# EAGLE board dotclock (EAGLE 7.2.0)
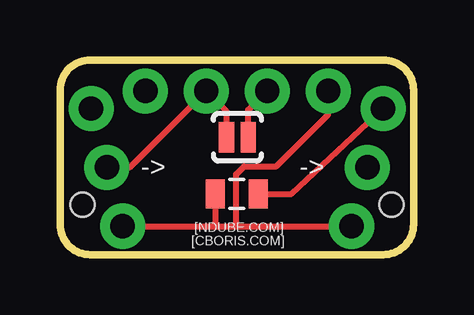
[diagram p0: board, top side]
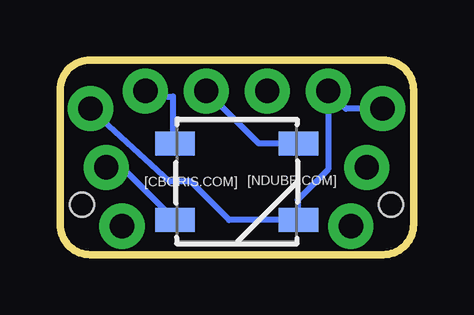
[diagram p1: board, bottom side, seen from below]

Size 14.73 x 8.13 mm. Coordinates in mm from the lower left corner, seen from the top.
Outline: 1.27,8.13 13.46,8.13 arc-90 14.73,6.86 14.73,1.27 arc-90 13.46,0 1.27,0 arc-90 0,1.27 0,6.86 arc-90 1.27,8.13
Copper layers (1*16): Top 0.035mm / dielectric 1.5mm / Bottom 0.035mm
Design rules "default": minimum track width 10mil, minimum drill 24mil, track to track 8mil, track to pad 8mil, pad to pad 8mil, via to via 8mil, smd to smd 8mil, copper to edge 40mil, drill to drill 8mil, minimum pad ring 10mil, minimum via ring 8mil, stop-mask expansion 4mil, vias tented up to drill 0mil, thermal gap 10mil
Holes 1 mm at 0.94,2.08 13.82,2.08

## Footprints (pad centres in the part's own frame; a part is rotated, then mirrored left to right if it is on the bottom)
0805 = smd 0.8 x 1.2: 1 -0.9,0; 2 0.9,0
WS2812B = smd 1.651 x 1: 1 -2.577,1.6; 2 -2.577,-1.6; 3 2.577,-1.6; 4 2.577,1.6
1X04_NO_SILK_ALL_ROUND = drill 1.016 pad 1.88: 1 0,0; 2 2.54,0; 3 5.08,0; 4 7.62,0
1X03_NO_SILK = drill 1.016 pad 1.88: 1 0,0; 2 2.54,0; 3 5.08,0
SJ_2S-NO = smd 0.635 x 1.27: 1 -0.45,0; 2 0.45,0

## Placement (x,y rotation side)
C2  [0805]  7.37,2.54 0 top
D1  [WS2812B]  7.37,3.05 0 bottom
JP1  [1X04_NO_SILK_ALL_ROUND]  3.56,6.83 0 top
JP3  [1X03_NO_SILK]  1.3,6.1 285 top
JP4  [1X03_NO_SILK]  13.46,6.1 285 bottom
SJ1  SOLDERJUMPERNO  [SJ_2S-NO]  7.39,4.9 0 top

## Library data of the parts
C2 = SparkFun-Capacitors
D1 = SparkFun-LED; PROD_ID: DIO-12503
JP1 JP3 JP4 = SparkFun-Connectors
SJ1 = SparkFun-Retired

## Nets
N$1: C2.1 D1.1 JP1.4 JP3.3 JP4.3
N$3: C2.2 D1.3 JP1.1 JP3.1 JP4.1
N$5: D1.2 JP4.2
N$6: JP1.2 JP3.2 SJ1.1
N$8: D1.4 JP1.3 SJ1.2

## Tracks (layer width: path | path; a pad name or v marks a point on that pad's centre or on a via)
N$1
  Top 0.254: JP3.3 6.6,1.19 | 7.34,1.19 JP4.3 | C2.1 6.47,1.33 6.6,1.19 | 10.92,6.58 JP1.4 11.18,5.84 9.02,3.68 7.67,3.68 7.34,3.35 7.34,1.19 | 6.6,1.19 7.34,1.19
  Bottom 0.254: D1.1 10.03,4.7 10.03,6.6 10.67,6.6 JP1.4
N$3
  Top 0.254: C2.2 9.65,2.54 JP4.1
  Bottom 0.254: JP4.1 10.16,3.05 9.28,3.05 7.68,1.45 D1.3 4.83,1.49 4.83,2.29 3.56,3.56 JP1.1 2.82,6.1 JP3.1
N$5
  Bottom 0.254: JP4.2 12.14,3.64 D1.2
N$6
  Top 0.254: JP3.2 2.91,3.64 JP1.2 6.94,5.99 SJ1.1
N$8
  Top 0.254: SJ1.2 7.84,6.04 JP1.3
  Bottom 0.254: D1.4 6.45,4.65 JP1.3

## Text on the board
tPlace: -> | -> | [NDUBE.COM] | [CBORIS.COM]
bPlace: [NDUBE.COM] | [CBORIS.COM]